# Altium PCB PCB_Hall_15mm_kss.PcbDoc
Units mm, origin at the board's own origin, x right, y up, seen from the top; angles counter-clockwise.
Board outline 28 x 50 mm, 4 copper layers (Top Layer, Signal Layer 1, Signal Layer 2, Bottom Layer), stack 0.778 mm thick; 11 components, 15 nets, 67 pads, 26 vias.
Unrouted connection lines stored in the file: 14.
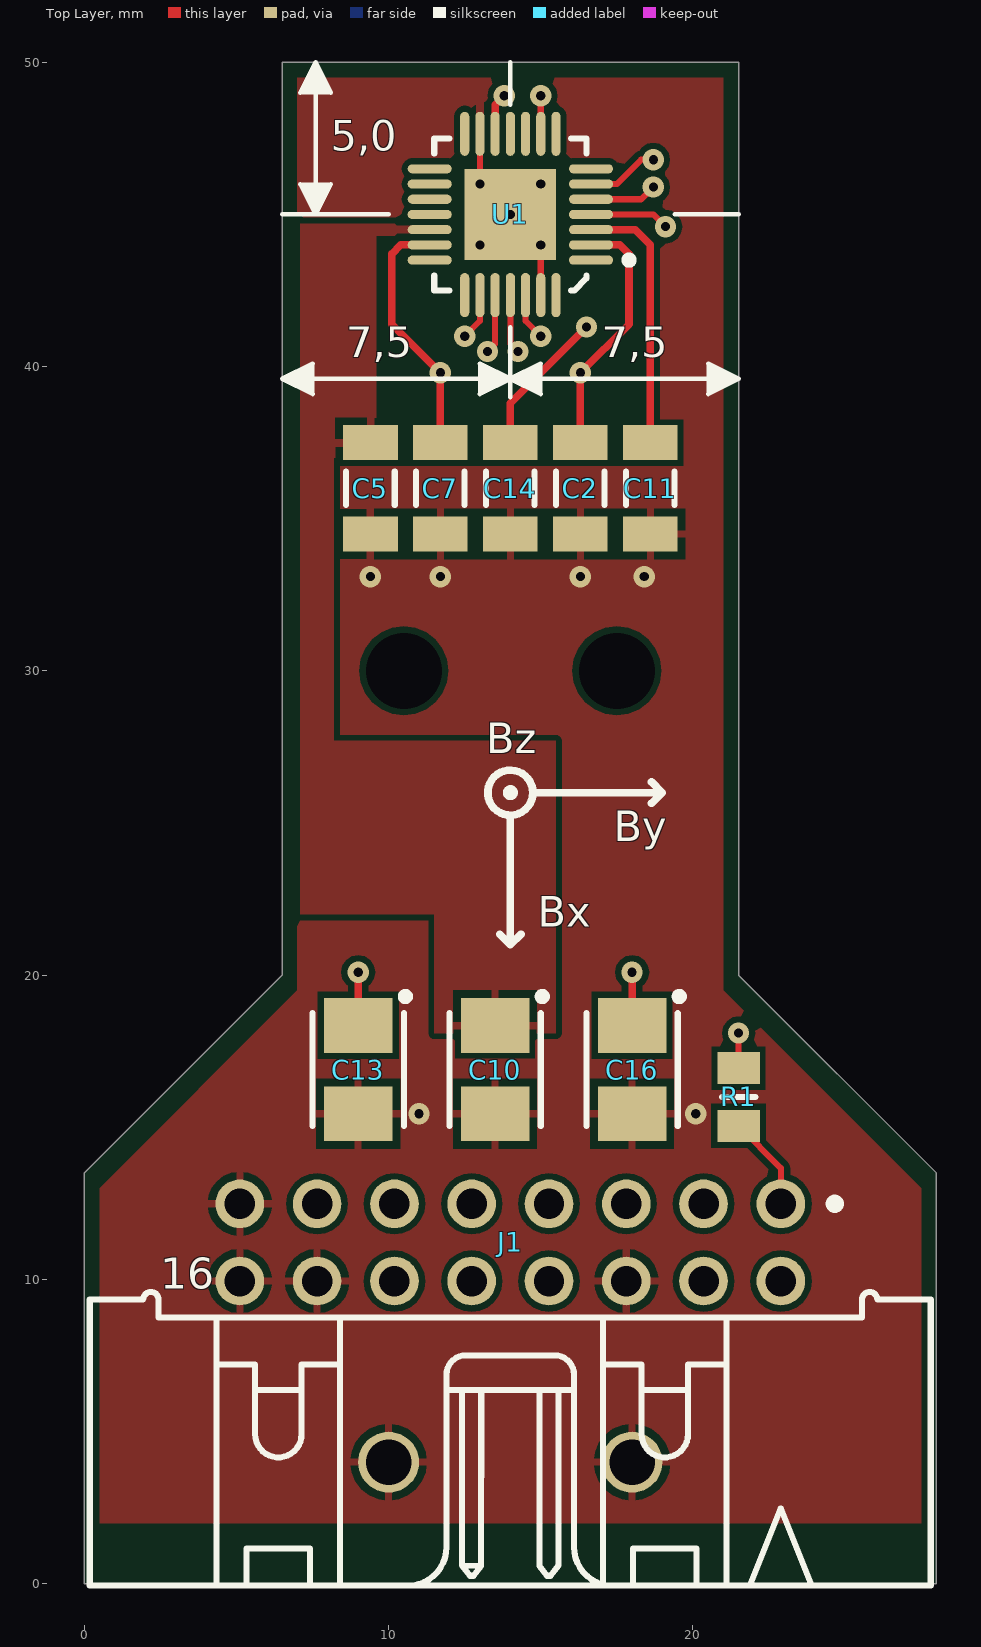
[diagram p0: Top Layer view]
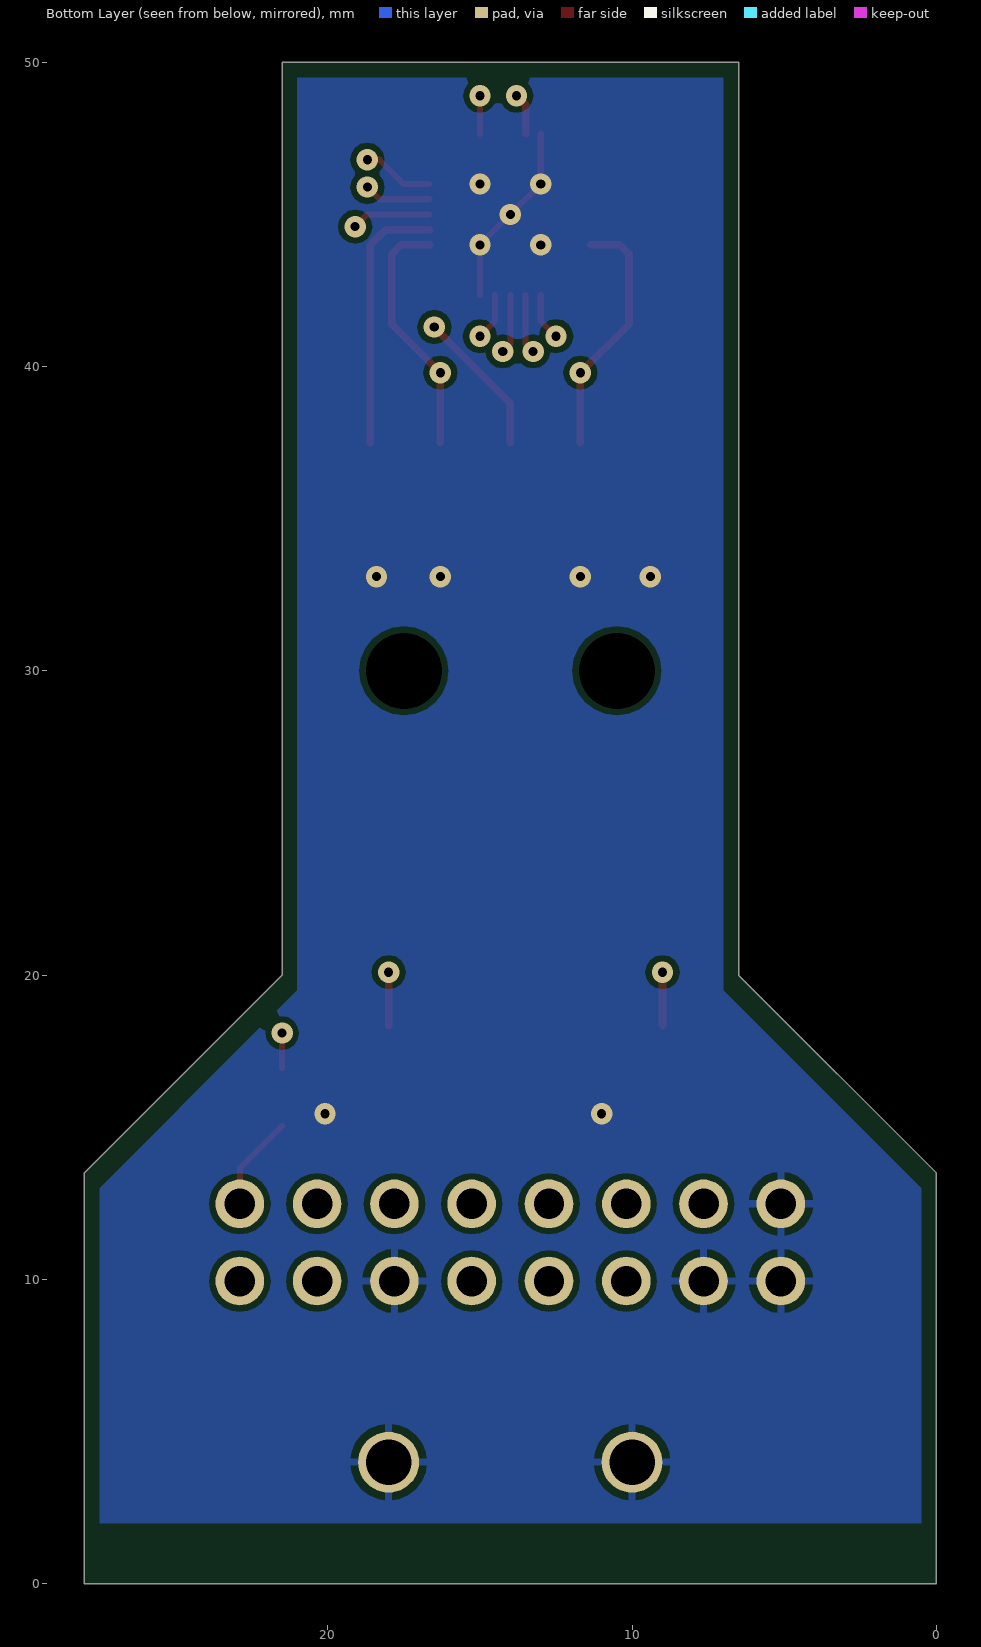
[diagram p1: Bottom Layer view, seen from below]
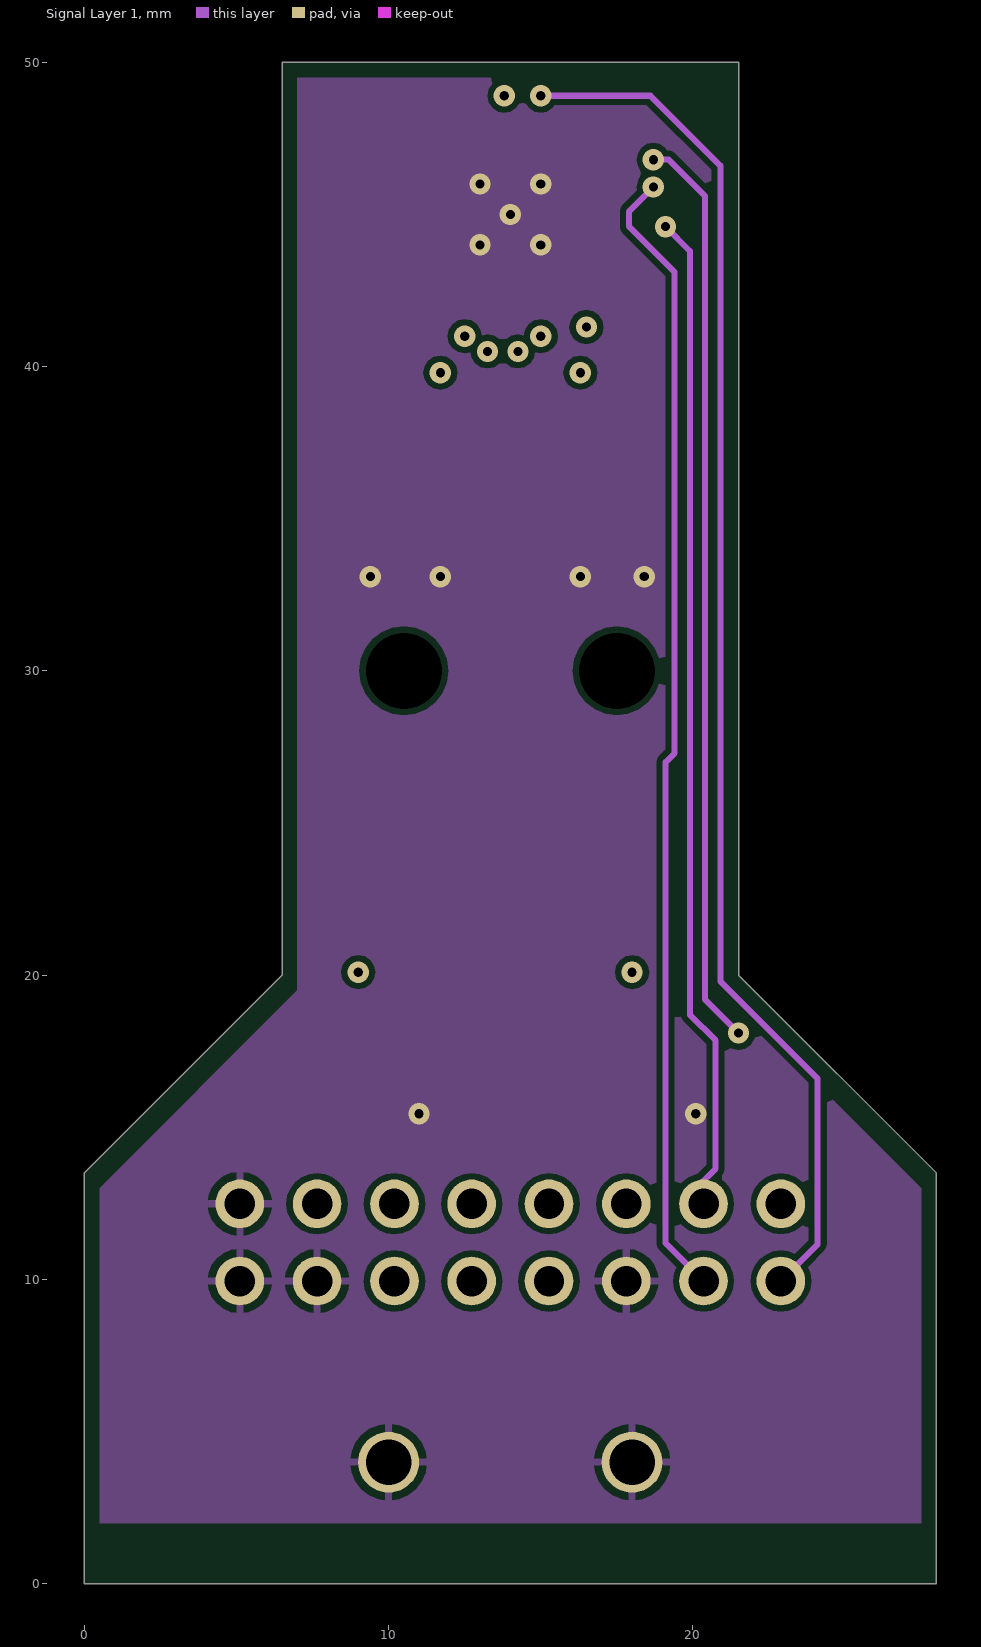
[diagram p2: Signal Layer 1]
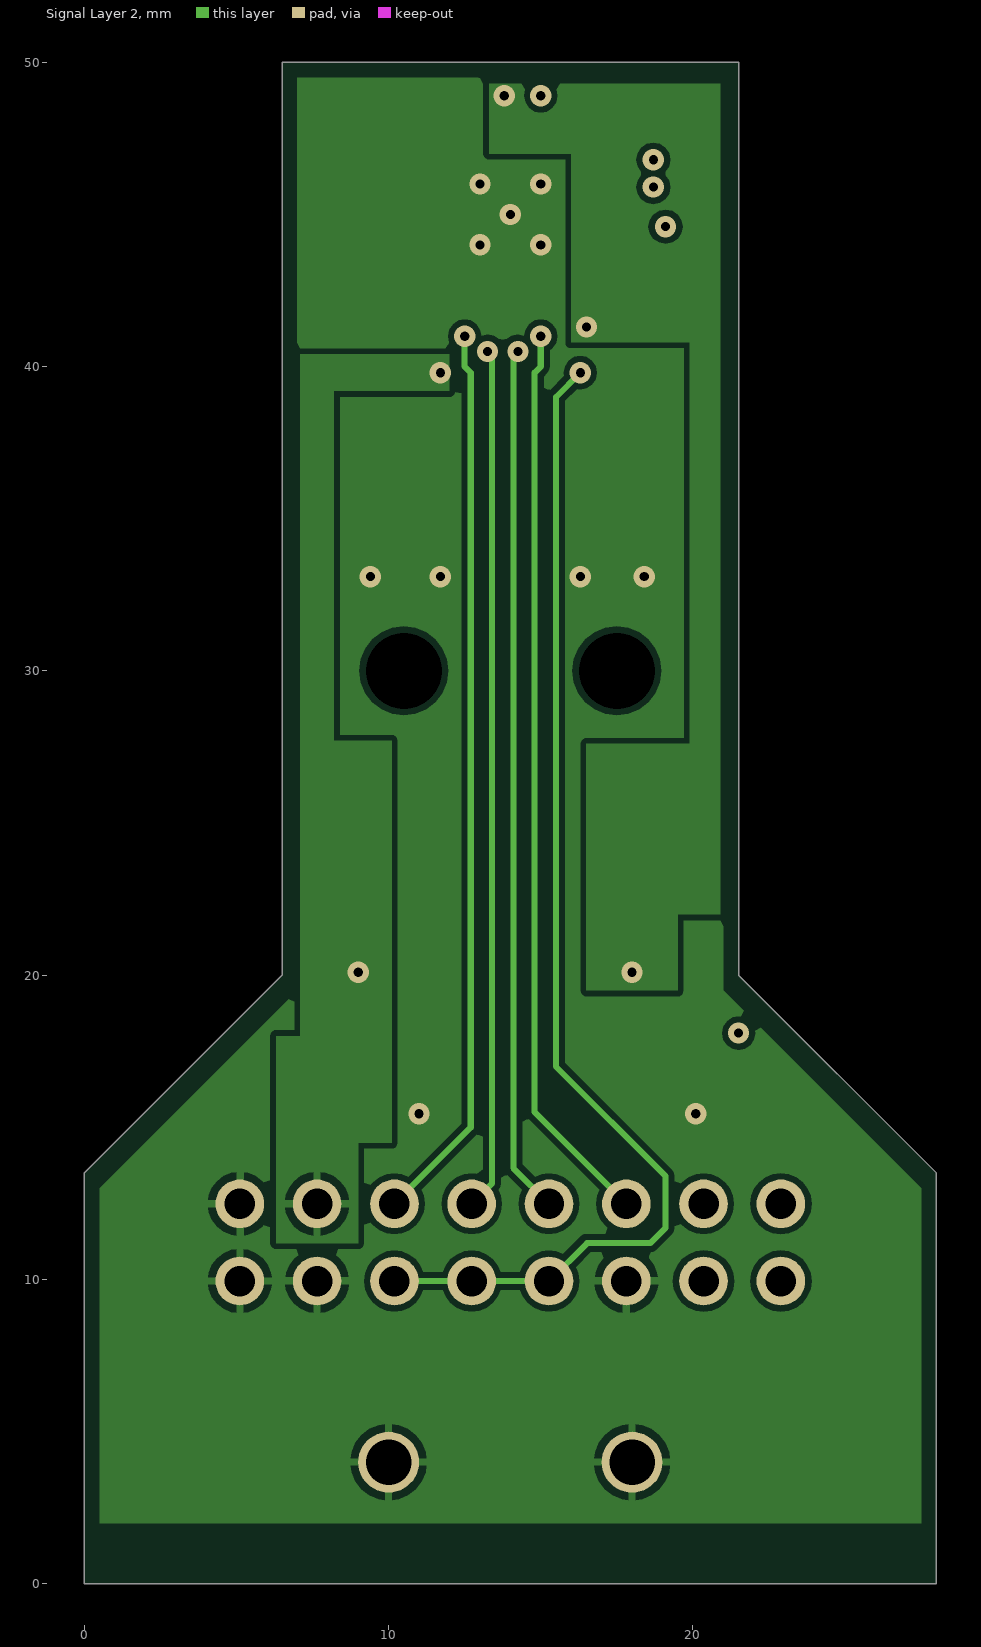
[diagram p3: Signal Layer 2]
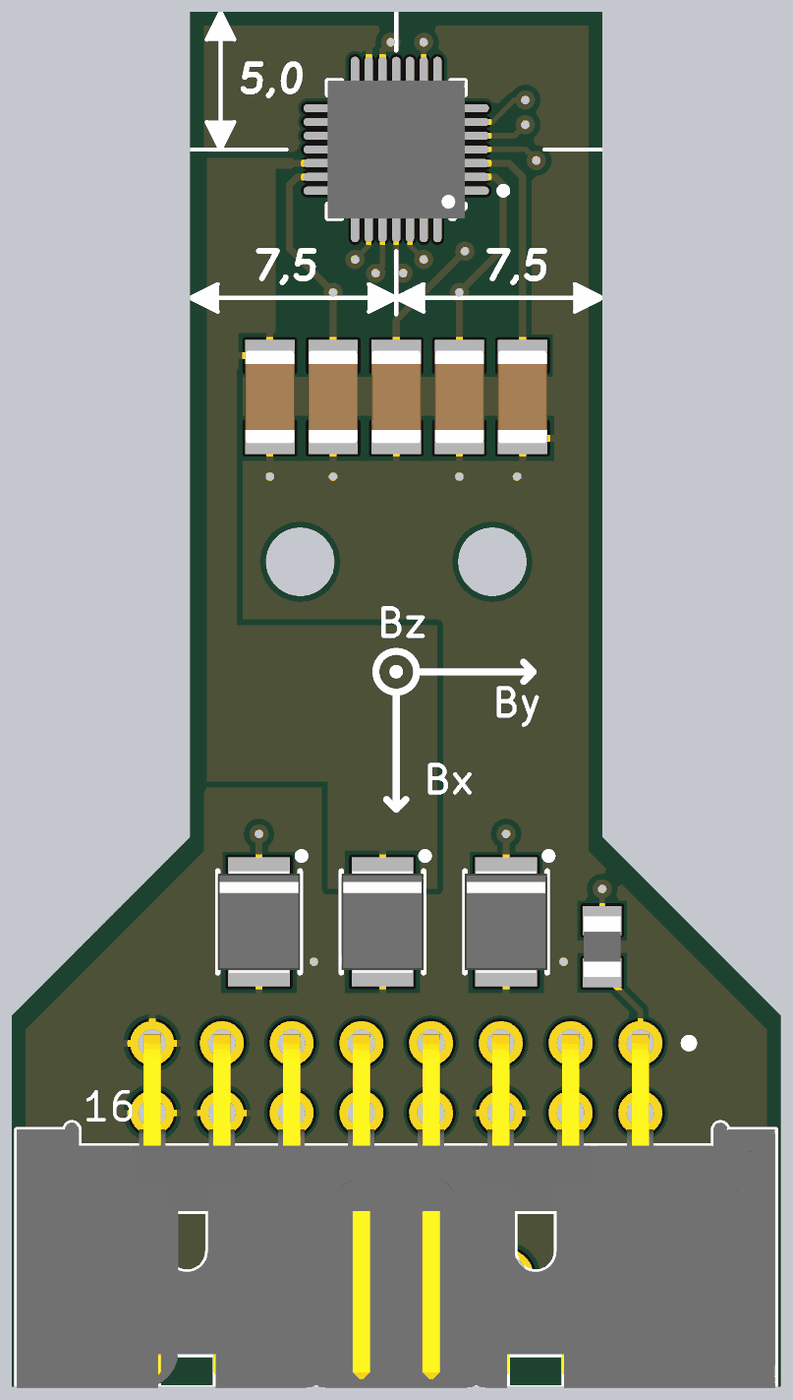
[diagram p4: 3D render of the assembled board from above, using the file's embedded part models]

## Layer stack, top to bottom
Top Solder: solder mask 0.0102, Solder Resist, Dk 3.5
Top Layer: signal copper 0.0356
Dielectric 1: core 0.254, FR-4, Dk 4.2
Signal Layer 1: signal copper 0.036
Dielectric 3: prepreg 0.127, Dk 4.2
Signal Layer 2: signal copper 0.036
Dielectric 2: core 0.254, Dk 4.2
Bottom Layer: signal copper 0.0356
Bottom Solder: solder mask 0.0102, Solder Resist, Dk 3.5

## Board outline
0,0 0,13.5 6.5,20 6.5,50 21.5,50 21.5,20 28,13.5 28,0

## Design rules (kind name [scope] priority, off if disabled: settings)
Clearance [All] p1: gap=0.2 ignorepadtopadclearanceinfootprint=FALSE
HoleSize [All] p1: absolutevalues=TRUE maxlimit=20 minlimit=0.3 maxpercent=80.000 minpercent=20.000
MinimumSolderMaskSliver [All] p1 off: minsoldermaskwidth=0.254
PasteMaskExpansion [All] p1 off: expansion=0
PolygonConnect [All] p1: thpad.connectstyle=Relief thpad.reliefconductorwidth=0.25 thpad.reliefentries=4 thpad.polygonreliefangle="90 Angle" thpad.airgapwidth=0.25 smdpad.connectstyle=Relief smdpad.reliefconductorwidth=0.25 smdpad.reliefentries=4 smdpad.polygonreliefangle="90 Angle" smdpad.airgapwidth=0.25 via.connectstyle=Direct via.reliefconductorwidth=0.254 via.reliefentries=4 via.polygonreliefangle="90 Angle" via.airgapwidth=0.254
RoutingCorners [All] p1: cornerstyle=45-Degree minsetback=0.5 maxsetback=2.54
RoutingTopology [InNetClass('All Nets')] p1: topology=Shortest
RoutingVias [All] p1: holewidth=0.3 width=0.55 viastyle="Through Hole" minholewidth=0.3 minwidth=0.45 maxholewidth=0.5 maxwidth=1.27
SilkToSilkClearance [All] p1 off: silktosilkclearance=0.254
SilkToSolderMaskClearance [IsPad] p1 off: minsilkscreentomaskgap=0.254 clearancetoexposedcopper=TRUE
SolderMaskExpansion [All] p1 off: expansion=0.102
UnRoutedNet [All] p1: checkbadconnections=TRUE
Width [All] p1: maxlimit=0.5 minlimit=0.2 preferedwidth=0.254 toplayer_prefwidth=0.2 midlayer2_maxwidth=0.254 bottomlayer_prefwidth=0.2 minimp=50.000000 maximp=50.000000 favimp=50.000000
22 further rules are at their usual default settings.

## Components (designator, comment, footprint, x,y, rotation, side; value= is the part's Value field where it differs from the comment)
C2 "0.1" CAPC3216X100N 16.3,36 r90 top
C5 "0.1" CAPC3216X100N 9.4,36 r270 top
C7 "0.1" CAPC3216X100N 11.7,36 r270 top
C10 "=Value" CAPMP3528X120N 13.5,16.9 r270 top
C11 "0.1" CAPC3216X100N 18.6,36 r90 top
C13 "=Value" CAPMP3528X120N 9,16.9 r270 top
C14 "0.1" CAPC3216X100N 14,36 r90 top
C16 "=Value" CAPMP3528X120N 18,16.9 r270 top
J1 "=Family" 3M_N2516-5002RB 14,11.22 r180 top
R1 "1k" RESC2012X70N 21.5,16 r270 top
U1 "Hall sensor" QFN50P500X500X100-29N-S325 14,45 r180 top locked

## Footprints (in the part's own frame and the unit in brackets; to place one, negate y for a bottom-side part, rotate by r counter-clockwise, add the part's x,y. Pads: shape width x height; smd on the part's side, far side on the other; paste and mask are expansions set on the pad)
3M_N2516-5002RB [mm] "16 Contacts - Right Angle .100\" x .100\" Low Profile Four-Wall Header"
  round 1.6 hole 1: 1(-8.89,-1.27) 2(-8.89,1.27) 3(-6.35,-1.27) 4(-6.35,1.27) 5(-3.81,-1.27) 6(-3.81,1.27) 7(-1.27,-1.27) 8(-1.27,1.27) 9(1.27,-1.27) 10(1.27,1.27) 11(3.81,-1.27) 12(3.81,1.27) 13(6.35,-1.27) 14(6.35,1.27) 15(8.89,-1.27) 16(8.89,1.27)
  silkscreen extent -13.81,-1.42 13.82,11.28, body extent -13.81,-1.59 13.82,11.27, height 8.64
CAPC3216X100N [mm] "Chip Capacitor, Body 3.2x1.6mm, IPC Medium Density"
  rect 1.15x1.8 smd: 1(-1.5,0) 2(1.5,0)
  silkscreen extent -0.55,-0.8 0.55,0.8, body extent -1.7,-0.9 1.7,0.9, height 0.94
CAPMP3528X120N [mm] "Capacitor, Polarized, Molded  Body 3.5x2.8mm, IPC Medium Density"
  rect 1.8x2.25 smd: 1(-1.45,0) 2(1.45,0)
  silkscreen extent -2.52,-1.5 1.85,1.68, body extent -1.85,-1.5 1.85,1.5, height 1.2
QFN50P500X500X100-29N-S325 [mm] "QFN, 0.50mm Pitch, Square; 28 pin, 5.00mm L X 5.00mm W X 1.00mm H body (w/thermal tab 3.25 X 3.25mm),  IPC Medium Density"
  oval 1.45x0.3 smd: 1(-2.65,1.5) 2(-2.65,1) 3(-2.65,0.5) 4(-2.65,0) 5(-2.65,-0.5) 6(-2.65,-1) 7(-2.65,-1.5) 15(2.65,-1.5) 16(2.65,-1) 17(2.65,-0.5) 18(2.65,0) 19(2.65,0.5) 20(2.65,1) 21(2.65,1.5)
  oval 0.3x1.45 smd: 8(-1.5,-2.65) 9(-1,-2.65) 10(-0.5,-2.65) 11(0,-2.65) 12(0.5,-2.65) 13(1,-2.65) 14(1.5,-2.65) 22(1.5,2.65) 23(1,2.65) 24(0.5,2.65) 25(0,2.65) 26(-0.5,2.65) 27(-1,2.65) 28(-1.5,2.65)
  rect 3x3 smd: 29(0,0)
  silkscreen extent -4.03,-2.5 2.5,2.5, body extent -2.5,-2.5 2.5,2.5, height 1
RESC2012X70N [mm] "Chip Resistor, EIA 0805, Metric 2012, Body 2.0x1.25mm, IPC Medium Density"
  rect 1.05x1.4 smd: 1(-0.95,0) 2(0.95,0)
  silkscreen extent 0,-0.55 0,0.55, body extent -1.1,-0.67 1.1,0.68, height 0.7

## Part data
C2 C5 C7 C11 C14: library part "Capacitor1206 - non polarized", "Non-polarised1206 capacitor", Dielectric type=X5R, SMD Solders=2, SolderOption=0, THD Solders=0, Vendor=any
C10 C13 C16: library part "Capacitor - polarized", "Polarised capacitor", SMD Solders=2, SolderOption=0, THD Solders=0
J1: library part "Connector 16", "Connector 16", SMD Solders=0, Solder Option=0, THD Solders=16
R1: library part "Resistor - 5%", "Resistor - 5%", Tolerance=5%, SMD Solders=2, SolderOption=0, THD Solders=0, TK=1000ppmC^(-1), Vendor=any
U1: "SENM3Dx Vertical Hall Sensor"

## Free pads (board coordinates)
  round 2 hole 1.5: 0(10,4) 0(18,4)
  round 0 hole 2.5 unplated: 0(10.5,30) 0(17.5,30)

## Via types
v1: diameter 0.7, hole 0.3, Top Layer to Bottom Layer, tented both sides, 26 vias

## Nets (pads, with @x,y where several pads share a name; then routed paths per layer and width w, separated by ;. In a path a pad name is that pad's centre, name@x,y a point inside that pad or via, vN(x,y) a via of type N, cw(c..) or ccw(c..) an arc to the next point about the centre after c; other vN are vias at no path point)
"5V Hall": C7.1 C13.1 J1.13 U1.20 | length 10
  Top Layer w0.25: C13.1 v1(9,20.1) ; U1.20 10.4,44 10.1,43.7 10.1,41.4 v1(11.7,39.8) C7.1
CS1: J1.2 U1.9 | length 46.6
  Top Layer w0.2: U1.9 v1(15,48.9)
  Signal Layer 1 w0.2: v1(15,48.9) 18.6,48.9 20.9,46.6 20.9,19.8 24.1,16.6 24.1,11.16 J1.2
GND: C2.1 C5.2 C7.2 C10.2 C11.1 C13.2 C14.1 C16.2 J1.6 J1.14 J1.15 J1.16 pad.0@10,4 pad.0@18,4 U1.13 U1.27 U1.29 | length 6.1
  Top Layer w0.2: U1.13 v1(13,46) v1(14,45) v1(15,44) U1.27
  other v1: 11,15.45 20.093,15.45 9.4,33.1 11.7,33.1 16.3,33.1 18.4,33.1 13,44 15,46
MCLK: J1.3 U1.4 | length 35.7
  Top Layer w0.2: U1.4 18.7,45 v1(19.1,44.6)
  Signal Layer 1 w0.2: v1(19.1,44.6) 19.9,43.8 19.9,18.7 20.743,17.857 20.743,13.643 20.2,13.1 20.2,12.64 J1.3
MISO: R1.1 U1.6 | length 33.7
  Top Layer w0.2: U1.6 17.5,46 18.3,46.8 v1(18.7,46.8) ; R1.1 v1(21.5,18.1)
  Signal Layer 1 w0.2: v1(18.7,46.8) 19.2,46.8 20.4,45.6 20.4,19.2 v1(21.5,18.1)
MOSI: J1.4 U1.5 | length 39.8
  Top Layer w0.2: U1.5 18.3,45.5 v1(18.7,45.9)
  Signal Layer 1 w0.2: v1(18.7,45.9) 17.9,45.1 17.9,44.6 19.4,43.1 19.4,27.3 19.1,27 19.1,11.2 J1.4
NetC5_1: C5.1 C10.1 U1.19
NetC11_2: C11.2 U1.3 | length 8.7
  Top Layer w0.25: U1.3 18.1,44.5 18.3,44.3
  Top Layer w0.254: 18.3,44.3 18.6,44 C11.2
NetC14_2: C14.2 C16.1 U1.12 | length 8
  Top Layer w0.25: U1.12 13.5,48.6 v1(13.8,48.9) ; C16.1 v1(18,20.1)
  Top Layer w0.254: C14.2 14,38.8 v1(16.5,41.3)
NetJ1_1: J1.1 R1.2 | length 3.1
  Top Layer w0.2: R1.2 22.89,13.66 J1.1
V1temp: J1.5 U1.26 | length 31.4
  Top Layer w0.2: U1.26 14.5,41.5 v1(15,41)
  Signal Layer 2 w0.2: v1(15,41) 15,40 14.8,39.8 14.8,15.5 J1.5
V1x: J1.9 U1.24 | length 30.3
  Top Layer w0.2: v1(13.25,40.5) 13.5,40.75 U1.24
  Signal Layer 2 w0.2: J1.9 13.4,13.16 13.4,40.35 v1(13.25,40.5)
V1y: J1.11 U1.23 | length 31.2
  Top Layer w0.2: v1(12.5,41) 13,41.5 U1.23
  Signal Layer 2 w0.2: J1.11 12.7,15 12.7,39.8 12.5,40 v1(12.5,41)
V1z: J1.7 U1.25 | length 30.5
  Top Layer w0.2: U1.25 14,40.75 v1(14.25,40.5)
  Signal Layer 2 w0.2: v1(14.25,40.5) 14.1,40.35 14.1,13.66 J1.7
Vref1: C2.2 J1.8 J1.10 J1.12 U1.2 | length 47.8
  Top Layer w0.25: C2.2 v1(16.3,39.8) 17.9,41.4 17.9,43.7 17.6,44 U1.2
  Signal Layer 2 w0.2: J1.12 J1.10 J1.8 16.52,11.2 18.6,11.2 19.1,11.7 19.1,13.4 15.5,17 15.5,39 v1(16.3,39.8)
pads on no net: U1.1 U1.7 U1.8 U1.10 U1.11 U1.14 U1.15 U1.16 U1.17 U1.18 U1.21 U1.22 U1.28

## Polygon pours and split planes (outlines as drawn)
GND on Top Layer "GNDtop" (solid, remove dead copper, pour order 8): 7,49.5 7,19.5 0.5,13 0.5,2 27.5,2 27.5,13 21,19.5 21,49.5
NetC5_1 on Top Layer "Vcca" (solid, remove dead copper, pour order 0): 11.5,18.1 11.5,22 7.1,22 7.1,44.7 12,44.7 12,44.3 9.6,44.3 9.6,37 8.2,37 8.2,27.7 15.5,27.7 15.5,18.1
GND on Signal Layer 2 "GNDmid2" (solid, remove dead copper, pour order 12): 7,49.5 7,19.5 0.5,13 0.5,2 27.5,2 27.5,13 21,19.5 21,49.5
NetC14_2 on Signal Layer 2 "Vdd" (solid, remove dead copper, pour order 4): 16.5,19.5 16.5,27.6 19.9,27.6 19.9,40.8 16,40.8 16,47 13.3,47 13.3,49.3 14.3,49.3 20.9,49.3 20.9,22 19.5,22 19.5,19.5
"5V Hall" on Signal Layer 2 "+5V" (solid, remove dead copper, pour order 2): 6.3,11.2 6.3,18 7.1,18 7.1,40.4 12,40.4 12,39.2 8.2,39.2 8.2,27.7 10.1,27.7 10.1,14.5 9,14.5 9,11.2
GND on Bottom Layer "GNDbot" (solid, remove dead copper, pour order 6): 7,49.5 7,19.5 0.5,13 0.5,2 27.5,2 27.5,13 21,19.5 21,49.5
GND on Signal Layer 1 "GNDmid1" (solid, remove dead copper, pour order 10): 7,49.5 7,19.5 0.5,13 0.5,2 27.5,2 27.5,13 21,19.5 21,49.5

## Silkscreen, mask and mechanical layers (free items; w line width, h text height)
Top Overlay:
  circle w0.254: c14,26 r0.12
  circle w0.254: c14,26 r0.74
  region: 7.6,45 7.1,46.05 8.1,46.05
  region: 7.6,50 8.1,48.95 7.1,48.95
  region: 21.5,39.6 20.45,39.1 20.45,40.1
  region: 14,39.6 12.95,39.1 12.95,40.1
  region: 14,39.6 15.05,40.1 15.05,39.1
  region: 6.5,39.6 7.55,40.1 7.55,39.1
  lines w0.15: 6.5,45 10,45 ; 7.1,46 7.6,45 ; 7.1,49 7.6,50 ; 7.5,39.1 6.5,39.6 ; 7.5,40.1 6.5,39.6 ; 8.1,46 7.6,45 ; 8.1,49 7.6,50 ; 13,39.1 14,39.6 ; 13,40.1 14,39.6 ; 14,39 14,41.3 ; 14,48.6 14,50 ; 15,39.1 14,39.6 ; 15,40.1 14,39.6 ; 19.4,45 21.5,45 ; 20.5,39.1 21.5,39.6 ; 20.5,40.1 21.5,39.6 ; 6.5,39.6 14,39.6 ; 7.6,45 7.6,50 ; 14,39.6 21.5,39.6
  lines w0.254: 13.65,21.35 14,21 ; 14,25.25 14,21 ; 14.35,21.35 14,21 ; 14.74,26 18.99,26 ; 18.64,25.65 18.99,26 ; 18.64,26.35 18.99,26
  text "5,0" at 8.1,47.1 h1
  text "7,5" at 8.6,40.3 h1
  text "7,5" at 17,40.3 h1
  text "Bz" at 13.2,27.3 h1
  text "By" at 17.4,24.4 h1
  text "Bx" at 14.9,21.6 h1
Mechanical 2:
  lines w0.05: 6.5,20 6.5,50 21.5,50 21.5,20 28,13.5 28,0 0,0 0,13.5 6.5,20 ; 6.5,20 6.5,20

## Dimensions
6.5,50 to 14,45 on Mechanical 5
10.5,30 to 17.5,30 on Mechanical 5
0,0 to 28,0 on Mechanical 5
6.5,50 to 21.5,50 on Mechanical 5
6.5,50 to 14,45 on Mechanical 5
6.5,50 to 6.5,20 on Mechanical 5
6.5,50 to 17.5,30 on Mechanical 5
21.5,50 to 28,0 on Mechanical 5

## Text inside footprints (layer, text, board x,y; h text height)
J1: Top Overlay "16" at 2.5,9.7 h1.02; Mechanical 14 "16" at 3.625,11.014 h1.02 r180